# EAGLE board OpenDeck-r1.2.2 (EAGLE 7.4.0), part 1 of 2
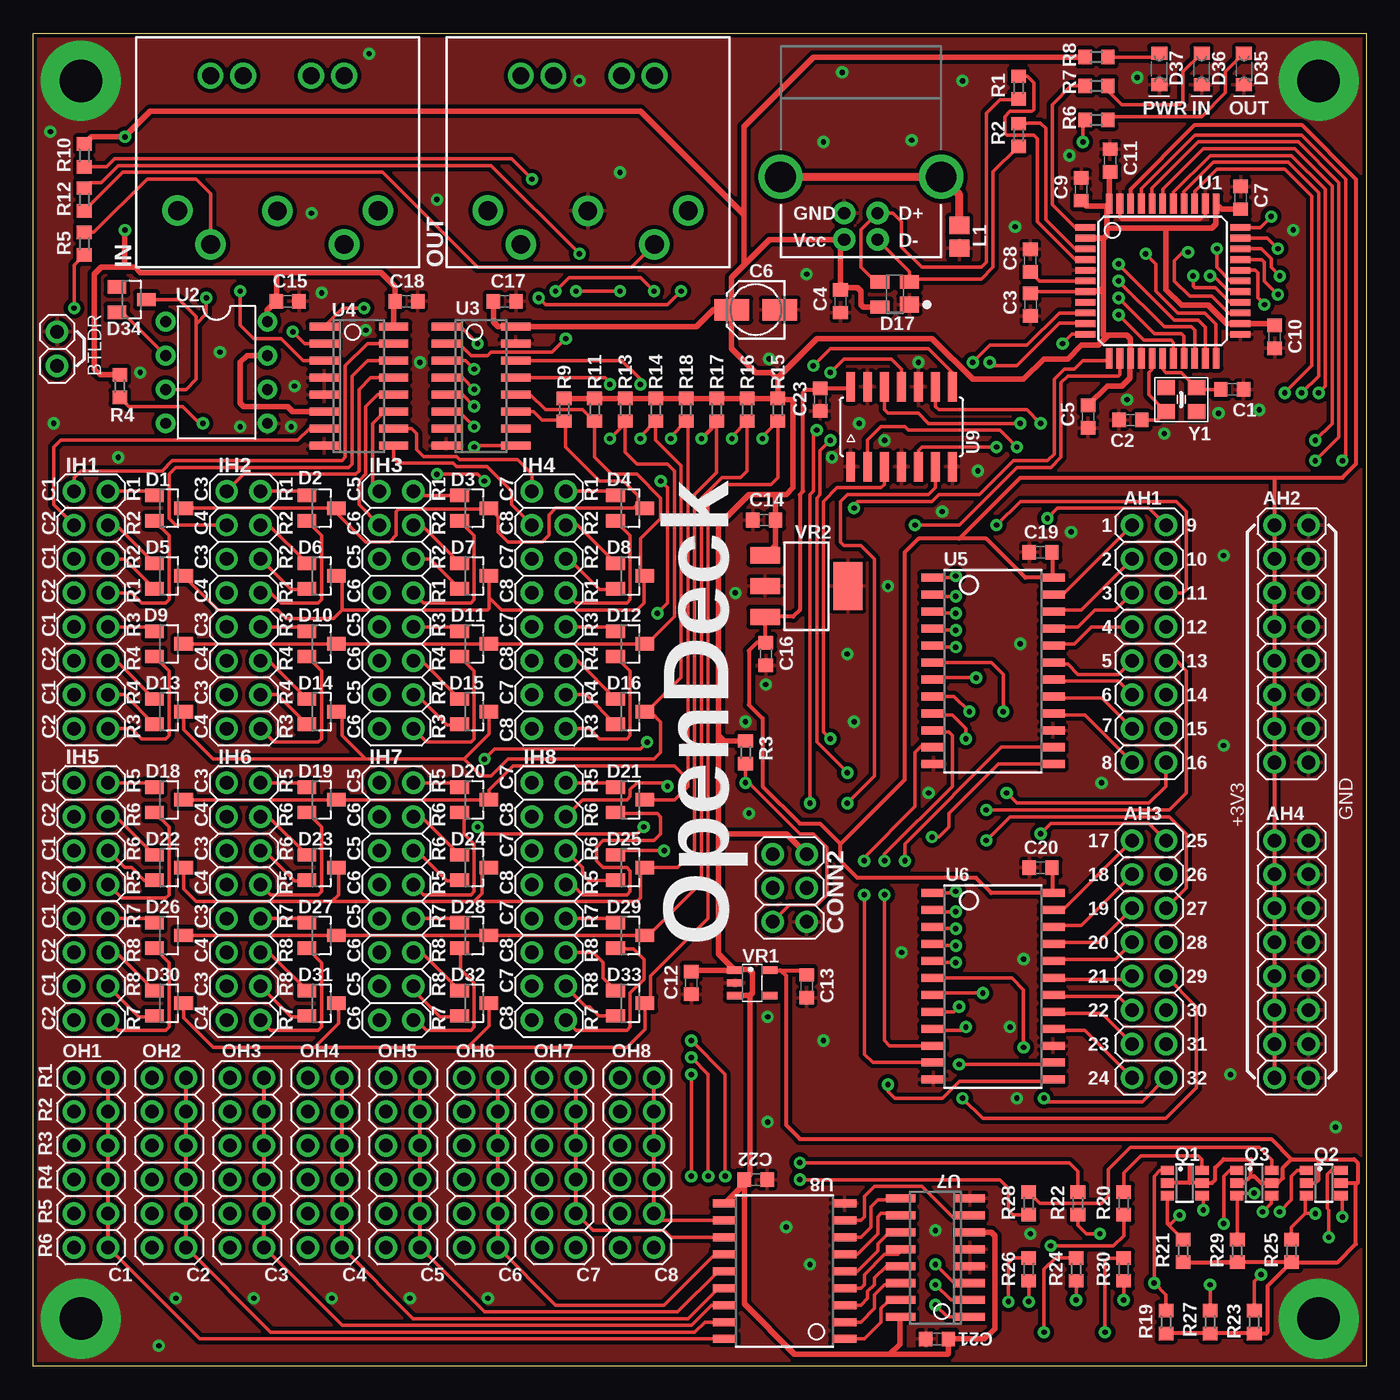
[diagram p0: board, top side]
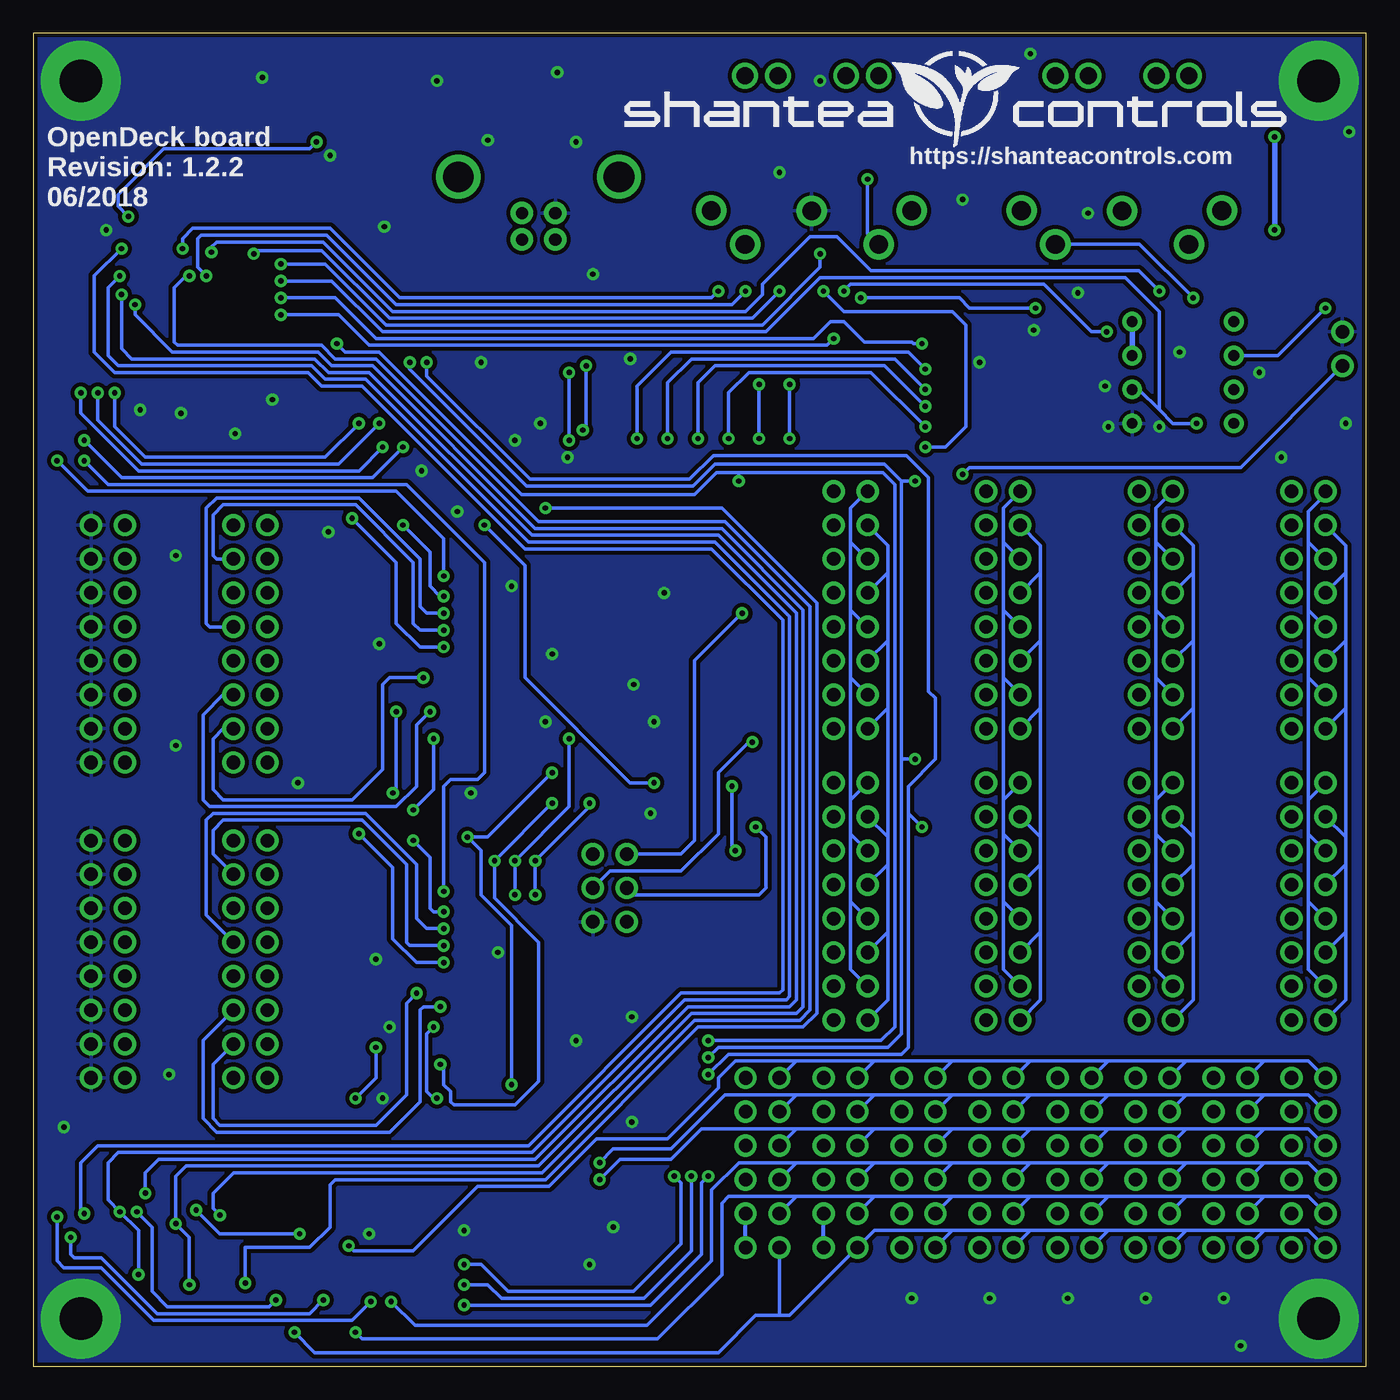
[diagram p1: board, bottom side, seen from below]

Size 99.82 x 99.82 mm. Coordinates in mm from the lower left corner, seen from the top.
Outline: 0,99.82 99.82,99.82 99.82,0 0,0 0,99.82
Copper layers (1*16): Top 0.035mm / dielectric 1.5mm / Bottom 0.035mm
Design rules "smiery": minimum track width 10mil, minimum drill 12mil, track to track 7mil, track to pad 5mil, pad to pad 5mil, via to via 6mil, smd to smd 0mil, copper to edge 12mil, drill to drill 10mil, minimum pad ring 13mil, minimum via ring 10mil, stop-mask expansion 2mil, vias tented up to drill 25mil, thermal gap 10mil
Net classes: 0 default: width 0.203 mm; 1 vcc: width 0.254 mm

## Footprints (pad centres in the part's own frame; a part is rotated, then mirrored left to right if it is on the bottom)
2X08-2.54 = drill 1.016: 1 -8.89,-1.27; 2 -8.89,1.27; 3 -6.35,-1.27; 4 -6.35,1.27; 5 -3.81,-1.27; 6 -3.81,1.27; 7 -1.27,-1.27; 8 -1.27,1.27; 9 1.27,-1.27; 10 1.27,1.27; 11 3.81,-1.27; 12 3.81,1.27; 13 6.35,-1.27; 14 6.35,1.27; 15 8.89,-1.27; 16 8.89,1.27
C0603 = smd 1 x 1.1: 1 -0.85,0; 2 0.85,0
153CLV-0405 = smd 2.6 x 1.6: + 1.8,0; - -1.8,0
USB-B-PTH = drill 0.914 pad 1.676: D+ 1.25,-4.572; D- 1.25,-6.553; GND -1.25,-4.572; VBUS -1.25,-6.553 | drill 2.286: S1 -6.02,-1.854; S2 6.02,-1.854
2X03-2.54-V = drill 1.016: 1 -2.54,-1.27; 2 -2.54,1.27; 3 0,-1.27; 4 0,1.27; 5 2.54,-1.27; 6 2.54,1.27
DIN5_SUPPORT = drill 1.4 pad 2.286: 1 -7.483,-4.768; 2 -0.003,-4.778; 3 7.527,-4.768; 4 -5.013,-7.298; 5 4.987,-7.288 | drill 1.27: 6 4.987,5.341; 7 -5.02,5.341; 8 -2.582,5.341; 9 2.523,5.341
1X02-2.54-V = drill 1.016: 1 -1.27,0; 2 1.27,0
SOT23 = smd 1.4 x 1: 1 -1.1,0.95; 2 -1.1,-0.95; 3 1.1,0
SOT143 = smd 1.44 x 1.2: 1 -1.1,0.75 | smd 1.44 x 1: 2 -1.1,-0.95; 3 1.1,-0.95; 4 1.1,0.95
0805_LED = smd 0.978 x 1.2: A -1.175,0; C 1.18,0
L0805 = smd 1.3 x 1.5: 1 -0.85,0; 2 0.85,0
2X06-2.54-V = drill 1.016: 1 -6.35,-1.27; 2 -6.35,1.27; 3 -3.81,-1.27; 4 -3.81,1.27; 5 -1.27,-1.27; 6 -1.27,1.27; 7 1.27,-1.27; 8 1.27,1.27; 9 3.81,-1.27; 10 3.81,1.27; 11 6.35,-1.27; 12 6.35,1.27
SSOT6 = smd 0.99 x 0.69: 1 -1.3,0.95; 2 -1.3,0; 3 -1.3,-0.95; 4 1.3,-0.95; 5 1.3,0; 6 1.3,0.95
R0603 = smd 1 x 1.1: 1 -0.85,0; 2 0.85,0
TQFP-44 = smd 1.5 x 0.5: 1 -5.8,4; 2 -5.8,3.2; 3 -5.8,2.4; 4 -5.8,1.6; 5 -5.8,0.8; 6 -5.8,0; 7 -5.8,-0.8; 8 -5.8,-1.6; 9 -5.8,-2.4; 10 -5.8,-3.2; 11 -5.8,-4; 23 5.8,-4; 24 5.8,-3.2; 25 5.8,-2.4; 26 5.8,-1.6; 27 5.8,-0.8; 28 5.8,0; 29 5.8,0.8; 30 5.8,1.6; 31 5.8,2.4; 32 5.8,3.2; 33 5.8,4 | smd 0.5 x 1.5: 12 -4,-5.8; 13 -3.2,-5.8; 14 -2.4,-5.8; 15 -1.6,-5.8; 16 -0.8,-5.8; 17 0,-5.8; 18 0.8,-5.8; 19 1.6,-5.8; 20 2.4,-5.8; 21 3.2,-5.8; 22 4,-5.8; 34 4,5.8; 35 3.2,5.8; 36 2.4,5.8; 37 1.6,5.8; 38 0.8,5.8; 39 0,5.8; 40 -0.8,5.8; 41 -1.6,5.8; 42 -2.4,5.8; 43 -3.2,5.8; 44 -4,5.8
DIL08 = drill 0.813: 1 -3.81,3.81; 2 -3.81,1.27; 3 -3.81,-1.27; 4 -3.81,-3.81; 5 3.81,-3.81; 6 3.81,-1.27; 7 3.81,1.27; 8 3.81,3.81
SO16 = smd 2.2 x 0.6: 1 -2.6,4.445; 2 -2.6,3.175; 3 -2.6,1.905; 4 -2.6,0.635; 5 -2.6,-0.635; 6 -2.6,-1.905; 7 -2.6,-3.175; 8 -2.6,-4.445; 9 2.6,-4.445; 10 2.6,-3.175; 11 2.6,-1.905; 12 2.6,-0.635; 13 2.6,0.635; 14 2.6,1.905; 15 2.6,3.175; 16 2.6,4.445
SO24-W = smd 1.8 x 0.6: 1 -4.475,6.985; 2 -4.475,5.715; 3 -4.475,4.445; 4 -4.475,3.175; 5 -4.475,1.905; 6 -4.475,0.635; 7 -4.475,-0.635; 8 -4.475,-1.905; 9 -4.475,-3.175; 10 -4.475,-4.445; 11 -4.475,-5.715; 12 -4.475,-6.985; 13 4.475,-6.985; 14 4.475,-5.715; 15 4.475,-4.445; 16 4.475,-3.175; 17 4.475,-1.905; 18 4.475,-0.635; 19 4.475,0.635; 20 4.475,1.905; 21 4.475,3.175; 22 4.475,4.445; 23 4.475,5.715; 24 4.475,6.985
SO18 = smd 1.8 x 0.6: 1 -4.475,5.08; 2 -4.475,3.81; 3 -4.475,2.54; 4 -4.475,1.27; 5 -4.475,0; 6 -4.475,-1.27; 7 -4.475,-2.54; 8 -4.475,-3.81; 9 -4.475,-5.08; 10 4.475,-5.08; 11 4.475,-3.81; 12 4.475,-2.54; 13 4.475,-1.27; 14 4.475,0; 15 4.475,1.27; 16 4.475,2.54; 17 4.475,3.81; 18 4.475,5.08
SOIC14 = smd 2.2 x 0.66: 1 -3,3.81; 2 -3,2.54; 3 -3,1.27; 4 -3,0; 5 -3,-1.27; 6 -3,-2.54; 7 -3,-3.81; 8 3,-3.81; 9 3,-2.54; 10 3,-1.27; 11 3,0; 12 3,1.27; 13 3,2.54; 14 3,3.81
SOT23-5 = smd 1.2 x 0.55: 1 1.3,-0.95; 2 1.3,0; 3 1.3,0.95; 4 -1.3,0.95; 5 -1.3,-0.95
SOT223 = smd 2.235 x 1.219: 1 -3.099,2.311; 2 -3.099,0; 3 -3.099,-2.311 | smd 2.2 x 3.6: 4 3.099,0
CRYSTAL-SMD-3.2X2.5 = smd 1.3 x 1.1: 1 -1.15,-0.9; 2 1.15,-0.9; 3 1.15,0.9; 4 -1.15,0.9

## Placement (x,y rotation side)
AH1  PINHD-2X08-TH-2.54MM  [2X08-2.54]  83.57,54.1 270 top
AH2  PINHD-2X08-TH-2.54MM  [2X08-2.54]  94.23,54.1 270 top
AH3  PINHD-2X08-TH-2.54MM  [2X08-2.54]  83.57,30.48 270 top
AH4  PINHD-2X08-TH-2.54MM  [2X08-2.54]  94.23,30.48 270 top
C1  22p  [C0603]  89.79,73.15 0 top
C2  22p  [C0603]  82.17,70.87 180 top
C3  100n  [C0603]  74.68,79.5 270 top
C4  100n  [C0603]  60.45,79.76 90 top
C5  100n  [C0603]  78.99,71.12 270 top
C6  10u  [153CLV-0405]  54.1,79.12 180 top
C7  100n  [C0603]  90.42,87.5 90 top
C8  1u  [C0603]  74.68,82.8 90 top
C9  100n  [C0603]  78.49,88.14 90 top
C10  100n  [C0603]  92.96,77.09 270 top
C11  100n  [C0603]  80.64,90.3 90 top
C12  4.7u  [C0603]  49.28,28.7 270 top
C13  4.7u  [C0603]  57.91,28.45 270 top
C14  4.7u  [C0603]  54.74,63.37 180 top
C15  100n  [C0603]  19.05,79.76 180 top
C16  4.7u  [C0603]  54.86,53.34 270 top
C17  100n  [C0603]  35.31,79.76 180 top
C18  100n  [C0603]  27.94,79.76 180 top
C19  100n  [C0603]  75.44,60.96 0 top
C20  100n  [C0603]  75.44,37.34 0 top
C21  100n  [C0603]  67.69,2.03 180 top
C22  100n  [C0603]  54.1,13.97 0 top
C23  100n  [C0603]  58.93,72.39 90 top
CONN1  USB-B-PTH  [USB-B-PTH]  61.98,90.93 0 top
CONN2  PINHD-2X03-TH-2.54MM-V  [2X03-2.54-V]  56.64,35.81 270 top
CONN3  MIDI_CONN-STD  [DIN5_SUPPORT]  18.29,91.31 0 top
CONN4  MIDI_CONN-STD  [DIN5_SUPPORT]  41.53,91.31 0 top
CONN5  PINHD-1X02-TH-2.54MM  [1X02-2.54-V]  1.78,76.2 90 top
D1  BAW56  [SOT23]  10.16,64.26 0 top
D2  BAW56  [SOT23]  21.59,64.26 0 top
D3  BAW56  [SOT23]  33.02,64.26 0 top
D4  BAW56  [SOT23]  44.7,64.26 0 top
D5  BAW56  [SOT23]  10.16,59.18 0 top
D6  BAW56  [SOT23]  21.59,59.18 0 top
D7  BAW56  [SOT23]  33.02,59.18 0 top
D8  BAW56  [SOT23]  44.7,59.18 0 top
D9  BAW56  [SOT23]  10.16,54.1 0 top
D10  BAW56  [SOT23]  21.59,54.1 0 top
D11  BAW56  [SOT23]  33.02,54.1 0 top
D12  BAW56  [SOT23]  44.7,54.1 0 top
D13  BAW56  [SOT23]  10.16,49.02 0 top
D14  BAW56  [SOT23]  21.59,49.02 0 top
D15  BAW56  [SOT23]  33.02,49.02 0 top
D16  BAW56  [SOT23]  44.7,49.02 0 top
D17  PRTR5V0U2X  [SOT143]  64.52,80.26 180 top
D18  BAW56  [SOT23]  10.16,42.42 0 top
D19  BAW56  [SOT23]  21.59,42.42 0 top
D20  BAW56  [SOT23]  33.02,42.42 0 top
D21  BAW56  [SOT23]  44.7,42.42 0 top
D22  BAW56  [SOT23]  10.16,37.34 0 top
D23  BAW56  [SOT23]  21.59,37.34 0 top
D24  BAW56  [SOT23]  33.02,37.34 0 top
D25  BAW56  [SOT23]  44.7,37.34 0 top
D26  BAW56  [SOT23]  10.16,32.26 0 top
D27  BAW56  [SOT23]  21.59,32.26 0 top
D28  BAW56  [SOT23]  33.02,32.26 0 top
D29  BAW56  [SOT23]  44.7,32.26 0 top
D30  BAW56  [SOT23]  10.16,27.18 0 top
D31  BAW56  [SOT23]  21.59,27.18 0 top
D32  BAW56  [SOT23]  33.02,27.18 0 top
D33  BAW56  [SOT23]  44.7,27.18 0 top
D34  BAW56  [SOT23]  7.37,79.88 0 top
D35  Red  [0805_LED]  90.68,97.16 270 top
D36  Yellow  [0805_LED]  87.5,97.16 270 top
D37  Green  [0805_LED]  84.33,97.16 270 top
IH1  PINHD-2X08-TH-2.54MM  [2X08-2.54]  4.32,56.64 270 top
IH2  PINHD-2X08-TH-2.54MM  [2X08-2.54]  15.75,56.64 270 top
IH3  PINHD-2X08-TH-2.54MM  [2X08-2.54]  27.18,56.64 270 top
IH4  PINHD-2X08-TH-2.54MM  [2X08-2.54]  38.61,56.64 270 top
IH5  PINHD-2X08-TH-2.54MM  [2X08-2.54]  4.32,34.8 270 top
IH6  PINHD-2X08-TH-2.54MM  [2X08-2.54]  15.75,34.8 270 top
IH7  PINHD-2X08-TH-2.54MM  [2X08-2.54]  27.18,34.8 270 top
IH8  PINHD-2X08-TH-2.54MM  [2X08-2.54]  38.61,34.8 270 top
L1  FERRITE_BEAD-BLM21PG221SN1D  [L0805]  69.34,84.58 90 top
OH1  PINHD-2X06-TH-2.54MM  [2X06-2.54-V]  4.32,15.24 270 top
OH2  PINHD-2X06-TH-2.54MM  [2X06-2.54-V]  10.16,15.24 270 top
OH3  PINHD-2X06-TH-2.54MM  [2X06-2.54-V]  16,15.24 270 top
OH4  PINHD-2X06-TH-2.54MM  [2X06-2.54-V]  21.84,15.24 270 top
OH5  PINHD-2X06-TH-2.54MM  [2X06-2.54-V]  27.69,15.24 270 top
OH6  PINHD-2X06-TH-2.54MM  [2X06-2.54-V]  33.53,15.24 270 top
OH7  PINHD-2X06-TH-2.54MM  [2X06-2.54-V]  39.37,15.24 270 top
OH8  PINHD-2X06-TH-2.54MM  [2X06-2.54-V]  45.21,15.24 270 top
Q1  FDC6312P  [SSOT6]  86.23,13.72 0 top
Q2  FDC6312P  [SSOT6]  96.65,13.72 0 top
Q3  FDC6312P  [SSOT6]  91.44,13.72 0 top
R1  22  [R0603]  73.79,95.76 90 top
R2  22  [R0603]  73.79,92.2 270 top
R3  10k  [R0603]  53.34,45.97 270 top
R4  10k  [R0603]  6.48,73.41 270 top
R5  220  [R0603]  3.81,84.07 270 top
R6  1k  [R0603]  79.63,93.34 180 top
R7  1k  [R0603]  79.63,95.89 180 top
R8  1k  [R0603]  79.63,98.04 0 top
R9  10k  [R0603]  39.75,71.63 270 top
R10  220  [R0603]  3.81,90.68 90 top
R11  10k  [R0603]  42.04,71.63 270 top
R12  220  [R0603]  3.81,87.38 90 top
R13  10k  [R0603]  44.32,71.63 270 top
R14  10k  [R0603]  46.61,71.63 270 top
R15  10k  [R0603]  55.75,71.63 270 top
R16  10k  [R0603]  53.47,71.63 270 top
R17  10k  [R0603]  51.18,71.63 270 top
R18  10k  [R0603]  48.9,71.63 270 top
R19  4k7  [R0603]  84.84,3.3 90 top
R20  47  [R0603]  81.66,12.19 90 top
R21  4k7  [R0603]  86.11,8.64 90 top
R22  47  [R0603]  78.23,12.19 90 top
R23  4k7  [R0603]  91.44,3.3 90 top
R24  47  [R0603]  78.11,7.24 270 top
R25  4k7  [R0603]  94.23,8.64 90 top
R26  47  [R0603]  74.55,7.24 270 top
R27  4k7  [R0603]  88.14,3.3 90 top
R28  47  [R0603]  74.55,12.19 90 top
R29  4k7  [R0603]  90.17,8.64 90 top
R30  47  [R0603]  81.66,7.24 270 top
U1  ATMEGA-32U4TQFP  [TQFP-44]  84.58,81.28 0 top
U2  6N137  [DIL08]  13.72,74.42 0 top
U3  74HC165  [SO16]  33.53,73.41 0 top
U4  74HC138-SO  [SO16]  24.38,73.41 0 top
U5  MC14067BDWR2G-SO24W  [SO24-W]  71.88,52.07 0 top
U6  MC14067BDWR2G-SO24W  [SO24-W]  71.88,28.45 0 top
U7  74HC238-SO  [SO16]  67.56,8.13 180 top
U8  ULN2803A-SO  [SO18]  56.26,7.11 180 top
U9  74AHC125  [SOIC14]  65.02,70.36 90 top
VR1  LP5907-4.5V  [SOT23-5]  53.85,28.7 180 top
VR2  MCP1825  [SOT223]  57.91,58.42 0 top
Y1  16MHz  [CRYSTAL-SMD-3.2X2.5]  85.98,72.39 0 top

## Library data of the parts
AH1-AH4 C1-C5 C7-C23 CONN1-CONN5 D35-D37 IH1-IH8 OH1-OH8 R1-R30 = igor_lbr
C6 = igor_lbr; MANUFACTURER: Multicomp; MPN: MCVVT016M100CA1L
D1-D16 D18-D34 = igor_lbr; MANUFACTURER: Multicomp; MPN: BAW56-7-F
D17 = igor_lbr; MANUFACTURER: Nexperia; MPN: PRTR5V0U2X
L1 = igor_lbr; MANUFACTURER: Murata; MPN: BLM21PG221SN1D
Q1-Q3 = igor_lbr; MANUFACTURER: ON Semiconductor; MPN: FDC6312P
U1 = igor_lbr; MPN: ATMEGA32U4-AUR
U2 = igor_lbr; MANUFACTURER: Vishay; MPN: 6N137
U3 = igor_lbr; MANUFACTURER: Nexperia; MPN: 74HC165D
U4 = igor_lbr; MANUFACTURER: Nexperia; MPN: 74HC138D
U5 U6 = igor_lbr; MANUFACTURER: ON Semiconductor; MPN: MC14067BDWR2G
U7 = igor_lbr; MANUFACTURER: Nexperia; MPN: 74HC238D
U8 = igor_lbr; MANUFACTURER: Texas Instruments; MPN: ULN2803ADWR
U9 = igor_lbr; MANUFACTURER: Texas Instruments; MPN: SN74AHC125DR
VR1 = igor_lbr; MANUFACTURER: Texas Instruments; MPN: LP5907MFX-4.5/NOPB
VR2 = igor_lbr; MANUFACTURER: Microchip; MPN: MCP1825S-3302E/DB
Y1 = igor_lbr; MANUFACTURER: TXC; MPN: 887-1424-1-ND

## Nets
+5V [vcc]: C3.1 C4.2 C5.1 C6.+ C7.1 C9.1 C10.1 C11.1 C12.1 C14.1 C15.2 C17.2 C18.2 C21.1 C22.1 CONN1.VBUS CONN2.2 D17.4 R3.1 R4.1 R8.1 R9.1 R10.2 R11.1 R13.1 R14.1 R15.1 R16.1 R17.1 R18.1 U1.2 U1.7 U1.14 U1.24 U1.34 U1.44 U2.7 U2.8 U3.16 U4.6 U4.16 U7.6 U7.16 U8.10 VR1.1 VR1.3 VR2.1
A_IN_1: AH1.1 U5.23
A_IN_2: AH1.3 U5.22
A_IN_3: AH1.5 U5.21
A_IN_4: AH1.7 U5.20
A_IN_5: AH1.9 U5.19
A_IN_6: AH1.11 U5.18
A_IN_7: AH1.13 U5.17
A_IN_8: AH1.15 U5.16
A_IN_9: AH1.6 U5.2
A_IN_10: AH1.8 U5.3
A_IN_11: AH1.4 U5.4
A_IN_12: AH1.2 U5.5
A_IN_13: AH1.16 U5.6
A_IN_14: AH1.14 U5.7
A_IN_15: AH1.12 U5.8
A_IN_16: AH1.10 U5.9
A_IN_17: AH3.1 U6.23
A_IN_18: AH3.3 U6.22
A_IN_19: AH3.5 U6.21
A_IN_20: AH3.7 U6.20
A_IN_21: AH3.9 U6.19
A_IN_22: AH3.11 U6.18
A_IN_23: AH3.13 U6.17
A_IN_24: AH3.15 U6.16
A_IN_25: AH3.6 U6.2
A_IN_26: AH3.8 U6.3
A_IN_27: AH3.4 U6.4
A_IN_28: AH3.2 U6.5
A_IN_29: AH3.16 U6.6
A_IN_30: AH3.14 U6.7
A_IN_31: AH3.12 U6.8
A_IN_32: AH3.10 U6.9
AREF: AH2.1 AH2.3 AH2.5 AH2.7 AH2.9 AH2.11 AH2.13 AH2.15 AH4.1 AH4.3 AH4.5 AH4.7 AH4.9 AH4.11 AH4.13 AH4.15 C16.1 C19.2 C20.2 C23.2 U1.42 U5.24 U6.24 U9.14 VR2.3
BC_1: IH1.1 IH1.5 IH1.9 IH1.13 IH5.1 IH5.5 IH5.9 IH5.13 U4.15
BC_2: IH1.3 IH1.7 IH1.11 IH1.15 IH5.3 IH5.7 IH5.11 IH5.15 U4.7
BC_3: IH2.1 IH2.5 IH2.9 IH2.13 IH6.1 IH6.5 IH6.9 IH6.13 U4.13
BC_4: IH2.3 IH2.7 IH2.11 IH2.15 IH6.3 IH6.7 IH6.11 IH6.15 U4.14
BC_5: IH3.1 IH3.5 IH3.9 IH3.13 IH7.1 IH7.5 IH7.9 IH7.13 U4.11
BC_6: IH3.3 IH3.7 IH3.11 IH3.15 IH7.3 IH7.7 IH7.11 IH7.15 U4.12
BC_7: IH4.1 IH4.5 IH4.9 IH4.13 IH8.1 IH8.5 IH8.9 IH8.13 U4.10
BC_8: IH4.3 IH4.7 IH4.11 IH4.15 IH8.3 IH8.7 IH8.11 IH8.15 U4.9
BR_1: D1.3 D2.3 D3.3 D4.3 R9.2 U3.11
BR_2: D5.3 D6.3 D7.3 D8.3 R11.2 U3.12
BR_3: D9.3 D10.3 D11.3 D12.3 R13.2 U3.13
BR_4: D13.3 D14.3 D15.3 D16.3 R14.2 U3.14
BR_5: D30.3 D31.3 D32.3 D33.3 R15.2 U3.3
BR_6: D26.3 D27.3 D28.3 D29.3 R16.2 U3.4
BR_7: D22.3 D23.3 D24.3 D25.3 R17.2 U3.5
BR_8: D18.3 D19.3 D20.3 D21.3 R18.2 U3.6
D+: R1.2 U1.4
D+X: CONN1.D+ D17.3 R1.1
D-: R2.1 U1.3
D-X: CONN1.D- D17.2 R2.2
DEC_BM_A0: U1.28 U4.1
DEC_BM_A1: U1.26 U4.2
DEC_BM_A2: U1.25 U4.3
DEC_LM_A0/SCK: CONN2.3 U1.9 U7.1
DEC_LM_A1/MOSI: CONN2.4 CONN5.1 U1.10 U7.2
DEC_LM_A2/MISO: CONN2.1 U1.11 U7.3
DEC_LM_Y0: U7.15 U8.1
DEC_LM_Y1: U7.14 U8.2
DEC_LM_Y2: U7.13 U8.3
DEC_LM_Y3: U7.12 U8.4
DEC_LM_Y4: U7.11 U8.5
DEC_LM_Y5: U7.10 U8.6
DEC_LM_Y6: U7.9 U8.7
DEC_LM_Y7: U7.7 U8.8
GND: AH2.2 AH2.4 AH2.6 AH2.8 AH2.10 AH2.12 AH2.14 AH2.16 AH4.2 AH4.4 AH4.6 AH4.8 AH4.10 AH4.12 AH4.14 AH4.16 C1.2 C2.2 C3.2 C4.1 C5.2 C6.- C7.2 C8.2 C9.2 C10.2 C11.2 C12.2 C13.2 C14.2 C15.1 C16.2 C17.1 C18.1 C19.1 C20.1 C21.2 C22.2 C23.1 CONN1.GND CONN2.6 CONN4.2 CONN5.2 D17.1 D35.C D36.C D37.C L1.1 U1.5 U1.15 U1.23 U1.35 U1.43 U2.5 U3.8 U3.15 U4.4 U4.5 U4.8 U5.12 U5.15 U6.12 U6.15 U7.4 U7.5 U7.8 U8.9 U9.1 U9.4 U9.7 U9.10 U9.13 VR1.2 VR2.2 VR2.4
IH1_2: D1.1 IH1.2
IH1_4: D5.1 IH1.4
IH1_6: D5.2 IH1.6
IH1_8: D1.2 IH1.8
IH1_10: D9.1 IH1.10
IH1_12: D13.1 IH1.12
IH1_14: D13.2 IH1.14
IH1_16: D9.2 IH1.16
IH2_2: D2.1 IH2.2
IH2_4: D6.1 IH2.4
IH2_6: D6.2 IH2.6
IH2_8: D2.2 IH2.8
IH2_10: D10.1 IH2.10
IH2_12: D14.1 IH2.12
IH2_14: D14.2 IH2.14
IH2_16: D10.2 IH2.16
IH3_2: D3.1 IH3.2
IH3_4: D7.1 IH3.4
IH3_6: D7.2 IH3.6
IH3_8: D3.2 IH3.8
IH3_10: D11.1 IH3.10
IH3_12: D15.1 IH3.12
IH3_14: D15.2 IH3.14
IH3_16: D11.2 IH3.16
IH4_2: D4.1 IH4.2
IH4_4: D8.1 IH4.4
IH4_6: D8.2 IH4.6
IH4_8: D4.2 IH4.8
IH4_10: D12.1 IH4.10
IH4_12: D16.1 IH4.12
IH4_14: D16.2 IH4.14
IH4_16: D12.2 IH4.16
IH5_2: D18.1 IH5.2
IH5_4: D22.1 IH5.4
IH5_6: D22.2 IH5.6
IH5_8: D18.2 IH5.8
IH5_10: D26.1 IH5.10
IH5_12: D30.1 IH5.12
IH5_14: D30.2 IH5.14
IH5_16: D26.2 IH5.16
IH6_2: D19.1 IH6.2
IH6_4: D23.1 IH6.4
IH6_6: D23.2 IH6.6
IH6_8: D19.2 IH6.8
IH6_10: D27.1 IH6.10
IH6_12: D31.1 IH6.12
IH6_14: D31.2 IH6.14
IH6_16: D27.2 IH6.16
IH7_2: D20.1 IH7.2
IH7_4: D24.1 IH7.4
IH7_6: D24.2 IH7.6
IH7_8: D20.2 IH7.8
IH7_10: D28.1 IH7.10
IH7_12: D32.1 IH7.12
IH7_14: D32.2 IH7.14
IH7_16: D28.2 IH7.16
IH8_2: D21.1 IH8.2
IH8_4: D25.1 IH8.4
IH8_6: D25.2 IH8.6
IH8_8: D21.2 IH8.8
IH8_10: D29.1 IH8.10
IH8_12: D33.1 IH8.12
IH8_14: D33.2 IH8.14
IH8_16: D29.2 IH8.16
LC_1: OH1.2 OH1.4 OH1.6 OH1.8 OH1.10 OH1.12 U8.18
LC_2: OH2.2 OH2.4 OH2.6 OH2.8 OH2.10 OH2.12 U8.17
LC_3: OH3.2 OH3.4 OH3.6 OH3.8 OH3.10 OH3.12 U8.16
LC_4: OH4.2 OH4.4 OH4.6 OH4.8 OH4.10 OH4.12 U8.15
LC_5: OH5.2 OH5.4 OH5.6 OH5.8 OH5.10 OH5.12 U8.14
LC_6: OH6.2 OH6.4 OH6.6 OH6.8 OH6.10 OH6.12 U8.13
LC_7: OH7.2 OH7.4 OH7.6 OH7.8 OH7.10 OH7.12 U8.12
LC_8: OH8.2 OH8.4 OH8.6 OH8.8 OH8.10 OH8.12 U8.11
LEDS_VCC: C13.1 Q1.2 Q1.5 Q2.2 Q2.5 Q3.2 Q3.5 R19.1 R21.1 R23.1 R25.1 R27.1 R29.1 VR1.5
LR_1_MI: Q1.1 R19.2 U1.12
LR_1_MO: OH1.1 OH2.1 OH3.1 OH4.1 OH5.1 OH6.1 OH7.1 OH8.1 R20.1
LR_1_MO_R: Q1.6 R20.2
LR_2_MI: Q1.3 R21.2 U1.27
LR_2_MO: OH1.3 OH2.3 OH3.3 OH4.3 OH5.3 OH6.3 OH7.3 OH8.3 R22.2
LR_2_MO_R: Q1.4 R22.1
LR_3_MI: Q3.1 R27.2 U1.29
LR_3_MO: OH1.5 OH2.5 OH3.5 OH4.5 OH5.5 OH6.5 OH7.5 OH8.5 R28.1
LR_3_MO_R: Q3.6 R28.2
LR_4_MI: Q2.3 R25.2 U1.32
LR_4_MO: OH1.7 OH2.7 OH3.7 OH4.7 OH5.7 OH6.7 OH7.7 OH8.7 R26.1
LR_4_MO_R: Q2.4 R26.2
LR_5_MI: Q2.1 R23.2 U1.31
LR_5_MO: OH1.9 OH2.9 OH3.9 OH4.9 OH5.9 OH6.9 OH7.9 OH8.9 R24.1
LR_5_MO_R: Q2.6 R24.2
LR_6_MI: Q3.3 R29.2 U1.30
LR_6_MO: OH1.11 OH2.11 OH3.11 OH4.11 OH5.11 OH6.11 OH7.11 OH8.11 R30.1
LR_6_MO_R: Q3.4 R30.2
MIDI_IN: R4.2 U1.20 U2.6
MIDI_IN_4: CONN3.4 R5.1
MIDI_IN_5: CONN3.5 D34.3 U2.3
MIDI_IN_DIODE_OUT: D34.2 R5.2 U2.2
MIDI_IN_LED: R7.2 U1.1
MIDI_IN_LED_R: D36.A R7.1
MIDI_OUT: R12.2 U1.21
MIDI_OUT_4: CONN4.4 R10.1
MIDI_OUT_5: CONN4.5 R12.1
MIDI_OUT_LED: R6.2 U1.33
MIDI_OUT_LED_R: D35.A R6.1
MUX_COMMON_1: U1.41 U5.1
MUX_COMMON_2: U1.40 U6.1
MUX_S0_3V3: U5.10 U6.10 U9.3
MUX_S0_5V: U1.38 U9.2
MUX_S1_3V3: U5.11 U6.11 U9.8
MUX_S1_5V: U1.36 U9.9
MUX_S2_3V3: U5.14 U6.14 U9.6
MUX_S2_5V: U1.39 U9.5
MUX_S3_3V3: U5.13 U6.13 U9.11
MUX_S3_5V: U1.37 U9.12
PWR_LED_R: D37.A R8.2
RESET: CONN2.5 R3.2 U1.13
SR_CLOCK: U1.18 U3.2
SR_OUT: U1.22 U3.9
SR_PARALLEL_LOAD: U1.19 U3.1
UCAP: C8.1 U1.6
USB_SHIELD: CONN1.S1 CONN1.S2 L1.2
XTAL1: C1.1 U1.17 Y1.3
XTAL2: C2.1 U1.16 Y1.1